# EAGLE board mapleSDuino-V0.9_006-eagle7 (EAGLE 7.6.0)
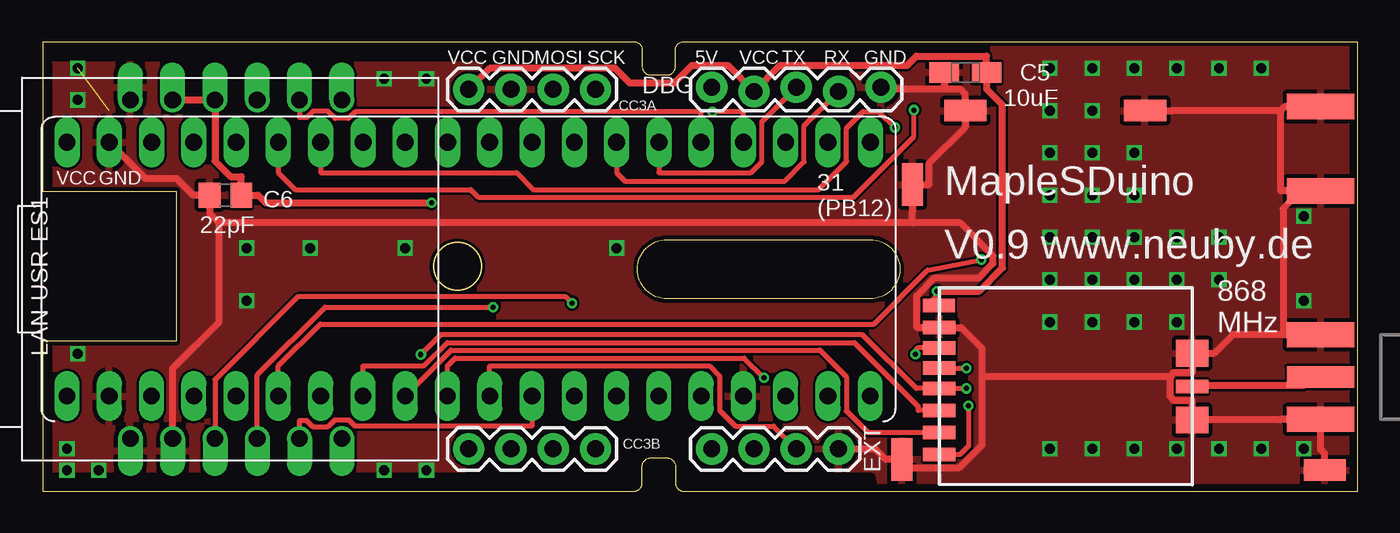
[diagram p0: board, top side]
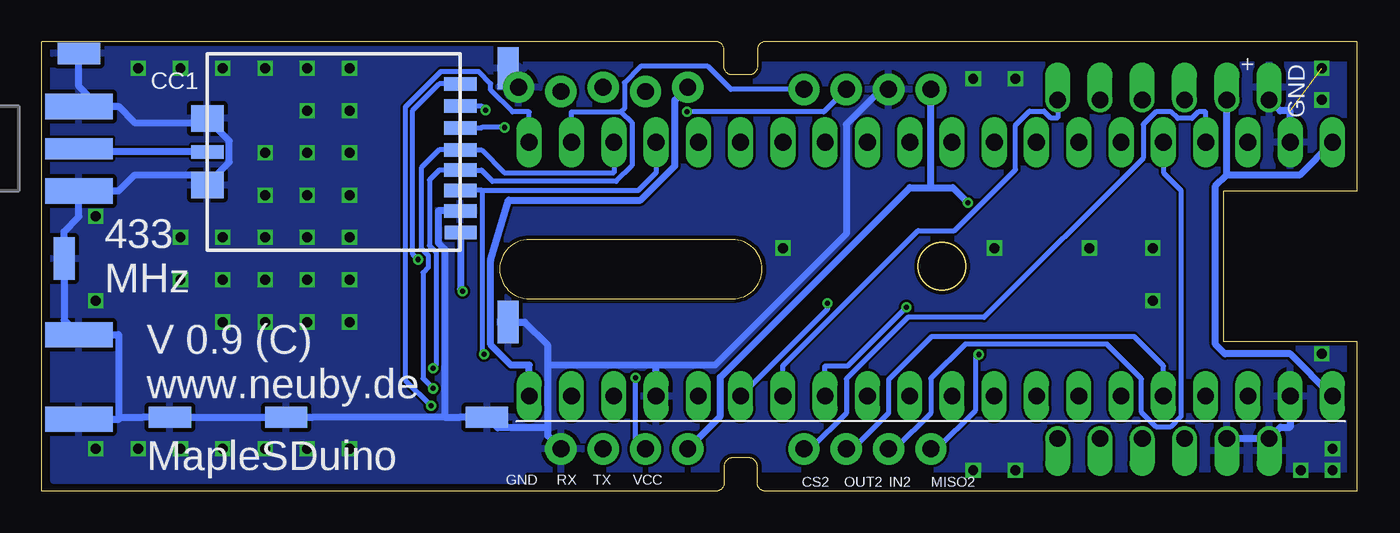
[diagram p1: board, bottom side, seen from below]

Size 79 x 27 mm. Coordinates in mm from the lower left corner, seen from the top.
Outline: 0,0 35.5,0 arc90 36,0.5 36,1.5 arc-90 36.5,2 37.5,2 arc-90 38,1.5 38,0.5 arc90 38.5,0 79,0 79,27 38.5,27 arc90 38,26.5 38,25.5 arc-90 37.5,25 36.5,25 arc-90 36,25.5 36,26.5 arc90 35.5,27 0,27 0,18 8,18 8,9 0,9 0,0
Outline: 37.5,15.11 49.7,15.11 arc-180 49.7,11.56 37.5,11.56 arc-180 37.5,15.11
Outline: circle at 24.9,13.51 radius 1.41
Copper layers (1*16): Top 0.035mm / dielectric 1.5mm / Bottom 0.035mm
Design rules "Fusion_eagle_rule_v1.1": minimum track width 6mil, minimum drill 12mil, track to track 6mil, track to pad 6mil, pad to pad 6mil, via to via 6mil, smd to smd 0mil, copper to edge 10mil, drill to drill 10mil, minimum pad ring 10mil, minimum via ring 6mil, stop-mask expansion 2mil, vias tented up to drill 100mil, thermal gap 10mil
Net classes: 0 default: width 0.305 mm; 1 PWR: width 0.406 mm
tRestrict: 8 lines
bRestrict: 8 lines

## Footprints (pad centres in the part's own frame; a part is rotated, then mirrored left to right if it is on the bottom)
R/2012-12W = smd 1.75 x 1.26: + 1.275,0; - -1.275,0
C0805 = smd 1.3 x 1.5: 1 -0.95,0; 2 0.95,0
CC1101_MODULE1_SMD = smd 1.93 x 0.813: ANT 14.889,4.381; CSN -0.305,0.305; GDO0 -0.305,1.626; GDO2 -0.305,2.946; GND@0 -0.305,7.925; MISO -0.305,4.267; MOSI -0.305,6.706; SCLK -0.305,5.486; VCC -0.318,9.238 | smd 1.93 x 1.6: GND@1 14.889,6.381; GND@2 14.889,2.381
1X04 = drill 1.016 pad 1.88: 1 0,0; 2 2.54,0; 3 5.08,0; 4 7.62,0
1X05_LOCK = drill 1.016 pad 1.88: 1 0,0.127; 2 2.54,-0.127; 3 5.08,0.127; 4 7.62,-0.127; 5 10.16,0.127
USR-ES1 = drill 1 pad 1.35 offset: 1 -10.16,5.715; 2 -10.16,3.175; 3 -10.16,0.635; 4 -10.16,-1.905; 5 -10.16,-4.445; 6 -10.16,-6.985; 7 10.16,-6.985; 8 10.16,-4.445; 9 10.16,-1.905; 10 10.16,0.635; 11 10.16,3.175; 12 10.16,5.715
SMD1,27-2,54 = smd 1.27 x 2.54: 1 0,0
20-DIP = drill 1.016 pad 1.27 long: 1 -24.13,-7.62; 2 -21.59,-7.62; 3 -19.05,-7.62; 4 -16.51,-7.62; 5 -13.97,-7.62; 6 -11.43,-7.62; 7 -8.89,-7.62; 8 -6.35,-7.62; 9 -3.81,-7.62; 10 -1.27,-7.62; 11 1.27,-7.62; 12 3.81,-7.62; 13 6.35,-7.62; 14 8.89,-7.62; 15 11.43,-7.62; 16 13.97,-7.62; 17 16.51,-7.62; 18 19.05,-7.62; 19 21.59,-7.62; 20 24.13,-7.62 | drill 1 pad 1.27 long: 21 24.13,7.62; 22 21.59,7.62; 23 19.05,7.62; 24 16.51,7.62; 25 13.97,7.62; 26 11.43,7.62; 27 8.89,7.62; 28 6.35,7.62; 29 3.81,7.62; 30 1.27,7.62; 31 -1.27,7.62; 32 -3.81,7.62; 33 -6.35,7.62; 34 -8.89,7.62; 35 -11.43,7.62; 36 -13.97,7.62; 37 -16.51,7.62; 38 -19.05,7.62; 39 -21.59,7.62; 40 -24.13,7.62
SMA_EDGELAUNCH = smd 4.064 x 1.524: GND@1 2.032,-2.54; GND@2 2.032,2.54 | smd 4.064 x 1.524 bottom: GND@3 2.032,2.54; GND@4 2.032,-2.54 | smd 4.064 x 1.27: P 2.032,0

## Placement (x,y rotation side)
C5  10uF  [R/2012-12W]  55.42,25.15 0 top
C6  22pF  [C0805]  10.97,17.78 180 top
CC0  CC1101  [CC1101_MODULE1_SMD]  54.15,1.91 0 top
CC1  CC1101_MODULE1SMALL  [CC1101_MODULE1_SMD]  54.15,24.77 180 bottom
CC3A  [1X04]  25.57,24.13 0 top
CC3B  [1X04]  25.57,2.54 0 top
DBG  [1X05_LOCK]  40.18,24.13 0 top
EXT  [1X04]  40.18,2.54 0 top
IC2  LAN-USR-ES1  [USR-ES1]  10.97,13.34 90 top
PAD1  WIREPADSMD1,27-254  [SMD1,27-2,54]  52.24,18.41 0 top
PAD2  WIREPADSMD1,27-254  [SMD1,27-2,54]  77.01,1.27 90 top
PAD3  WIREPADSMD1,27-254  [SMD1,27-2,54]  55.42,22.86 90 top
PAD4  WIREPADSMD1,27-254  [SMD1,27-2,54]  71.3,4.45 270 bottom
PAD5  WIREPADSMD1,27-254  [SMD1,27-2,54]  66.22,22.86 90 top
PAD6  WIREPADSMD1,27-254  [SMD1,27-2,54]  51.61,1.91 0 top
PAD7  WIREPADSMD1,27-254  [SMD1,27-2,54]  64.31,4.45 270 bottom
PAD8  WIREPADSMD1,27-254  [SMD1,27-2,54]  50.98,10.16 0 bottom
PAD9  WIREPADSMD1,27-254  [SMD1,27-2,54]  76.76,26.29 270 bottom
PAD10  WIREPADSMD1,27-254  [SMD1,27-2,54]  77.64,13.97 0 bottom
PAD11  WIREPADSMD1,27-254  [SMD1,27-2,54]  52.24,4.45 270 bottom
PAD12  WIREPADSMD1,27-254  [SMD1,27-2,54]  50.98,25.4 180 bottom
U$1  MAPLEMINI  [20-DIP]  25.57,13.34 180 bottom
X1  [SMA_EDGELAUNCH]  78.79,6.86 180 top
X2  [SMA_EDGELAUNCH]  78.79,20.57 0 bottom

## Library data of the parts
C5 C6 = rcl
CC0 CC1 = Martin-Communication-V4
CC3A CC3B EXT = SparkFun-Connectors; PROD_ID: CONN-09696
DBG = SparkFun-Connectors
IC2 = Martin-Communication
PAD1-PAD12 = wirepad
U$1 = maplemini-small
X1 X2 = adafruit

## Nets
+5V [PWR]: DBG.1 U$1.21
ANT1 [PWR]: CC1.ANT X2.P
ANT2: CC0.ANT X1.P
CC_CS0: CC0.CSN U$1.20
CC_CS1: CC1.CSN U$1.35
CC_CS2: CC3B.4 U$1.4
CC_CS3: U$1.25
CC_IN_0: CC0.GDO2 U$1.33
CC_IN_1: CC1.GDO2 U$1.7
CC_IN_2: CC3B.2 U$1.5
CC_IN_3: U$1.37
CC_OUT_0: CC0.GDO0 U$1.32
CC_OUT_1: CC1.GDO0 U$1.6
CC_OUT_2: CC3B.3 U$1.36
GND [PWR]: C5.- C6.2 CC0.GND@0 CC0.GND@1 CC0.GND@2 CC1.GND@0 CC1.GND@1 CC1.GND@2 CC3A.2 DBG.5 EXT.4 IC2.1 IC2.2 IC2.12 PAD1.1 PAD2.1 PAD3.1 PAD4.1 PAD5.1 PAD6.1 PAD7.1 PAD8.1 PAD9.1 PAD10.1 PAD11.1 PAD12.1 U$1.2 U$1.24 U$1.39 X1.GND@1 X1.GND@2 X1.GND@3 X1.GND@4 X2.GND@1 X2.GND@2 X2.GND@3 X2.GND@4
MISO1: IC2.7 U$1.27
MISO2: CC0.MISO CC1.MISO CC3B.1 U$1.18
MOSI1: IC2.3 U$1.26
MOSI2: CC0.MOSI CC1.MOSI CC3A.3 U$1.17
NRESET: U$1.34
RX1: DBG.4 U$1.14
RX2: EXT.3 U$1.30
RX3: U$1.22
SCK1: IC2.4 U$1.28
SCK2: CC0.SCLK CC1.SCLK CC3A.4 U$1.19
SS1: IC2.5 U$1.29
SWCLK/TCK: U$1.10
SWDIO/TMS: U$1.11
SWO/TDO: U$1.8
TDI: U$1.9
TX1: DBG.3 U$1.15
TX2: EXT.2 U$1.31
TX3: U$1.23
VCC [PWR]: C5.+ C6.1 CC0.VCC CC1.VCC CC3A.1 DBG.2 EXT.1 IC2.10 IC2.11 U$1.1 U$1.40
WIZ_RST: IC2.8 U$1.16

## Tracks (layer width: path | path; a pad name or v marks a point on that pad's centre or on a via)
+5V
  Bottom 0.406: U$1.21 49.7,7.58 50.8,7.58 52.02,8.8 52.02,13.86 50.94,17.48 43.01,17.48 40.95,19.54 40.95,23.48 DBG.1
ANT1
  Bottom 0.406: CC1.ANT 76.76,20.38 X2.P
ANT2
  Top 0.406: CC0.ANT arc-90 69.1,6.35 70.66,6.35 75.74,6.35 arc-90 76.25,6.86 X1.P
CC_CS0  (via drill 0.3 pad 0.61)
  Top 0.305: v55.6,5.12 55.6,2.7 55.12,2.21 CC0.CSN
  Bottom 0.305: v55.6,5.12 57.16,6.68 57.16,23.07 55.03,25.2 52.73,25.2 52.02,24.48 52.02,24.09 50.71,22.78 49.7,22.78 U$1.20
CC_CS1  (via drill 0.3 pad 0.61)
  Top 0.305: v56.38,13.91 53.15,13.28 49.91,10.04 16.66,10.04 14.14,7.53 U$1.35
  Bottom 0.305: CC1.CSN 55.12,24.46 56.7,22.88 56.7,14.23 v56.38,13.91
CC_CS2
  Bottom 0.305: U$1.4 9.06,22.78 9.51,22.78 9.9,22.39 10.75,22.39 11.14,22.79 12.06,22.79 12.82,22.04 12.82,20 22.38,10.44 26.96,10.44 30.66,6.75 30.66,4.69 32.8,2.54 CC3B.4
CC_IN_0
  Top 0.305: CC0.GDO2 52.58,4.85 52.58,5.12 48.76,8.93 24.28,8.93 22.88,7.53 19.23,7.53 U$1.33
CC_IN_1  (via drill 0.3 pad 0.61)
  Top 0.305: U$1.7 16.68,19.13 28.45,19.13 29.46,18.11 46.6,18.11 48.28,19.8 48.28,21.8 49.28,22.8 50.23,22.8 v51.18,21.84
  Bottom 0.305: CC1.GDO2 52.58,21.82 52.55,21.84 v51.18,21.84
CC_IN_2
  Bottom 0.305: CC3B.2 27.72,2.54 25.57,4.69 25.57,6.77 23.51,8.83 15,8.83 12.92,6.75 12.92,4.74 12.02,3.85 11.19,3.85 10.54,4.49 10.54,18.07 11.61,19.13 U$1.5
CC_OUT_0
  Top 0.305: U$1.32 24.52,8.47 46.67,8.47 48.27,6.87 48.27,4.82 49.56,3.53 CC0.GDO0
CC_OUT_1  (via drill 0.3 pad 0.61)
  Top 0.305: v52.33,22.89 52.33,21.29 48.7,17.66 26.15,17.66 25.69,18.11 15.16,18.11 14.14,19.13 U$1.6
  Bottom 0.305: v52.33,22.89 52.58,23.14 CC1.GDO0
CC_OUT_2
  Bottom 0.305: U$1.36 11.61,7.53 13.36,9.29 25.54,9.29 28.11,6.71 28.11,4.69 30.26,2.54 CC3B.3
GND  (via drill 0.6)  (1 unrouted)
  Top 0.406: 56.43,6.89 67.72,6.89 | 56.43,6.89 56.43,2.78 55.06,1.41 52.11,1.41 PAD6.1 50.62,1.91 49.98,2.54 EXT.4 | 56.43,6.89 56.43,8.57 55.17,9.83 CC0.GND@0 52.52,9.83 52.5,9.85 52.5,11.74 53.57,12.81 56.22,12.81 57.09,13.68 57.09,14.14 55.11,16.11 52.24,16.11 | 54.15,24.16 | 54.15,24.16 55.11,24.16 55.42,23.85 PAD3.1 55.42,21.87 53.24,19.68 53.24,18.41 PAD1.1 52.24,17.6 52.24,16.79 52.24,16.11 | DBG.5 50.44,24.16 54.15,24.16 | 52.24,16.11 10.58,16.11 | 67.72,6.89 67.96,7.13 69.04,7.13 CC0.GND@1 70.36,8.29 71.47,9.4 74.51,9.4 | 67.72,6.89 67.72,5.68 67.96,5.44 69.04,5.44 CC0.GND@2 74.34,4.29 74.37,4.32 X1.GND@2 76.76,2.52 77.01,2.26 PAD2.1 | 74.37,22.86 74.62,23.11 75.56,23.11 X2.GND@2 | 74.37,22.86 74.37,18.03 75.56,18.03 | 74.37,22.86 67.84,22.86 PAD5.1 | 75.56,18.03 74.51,16.98 74.51,9.4 | X1.GND@1 74.51,9.4 | X2.GND@1 75.56,18.03 | C5.- 54.15,24.16 | 10.58,16.11 10.02,16.67 C6.2 9.01,17.78 8.01,18.78 6.16,18.78 U$1.2 | IC2.2 7.79,7.37 10.58,10.16 10.58,16.11
  Bottom 0.406: 48.59,7.58 48.59,8.76 49.98,10.16 PAD8.1 | 48.59,3.8 48.59,7.58 | 42.09,7.58 48.59,7.58 | CC3A.2 28.56,24.13 30.66,22.03 30.66,15.46 38.54,7.58 42.09,7.58 | 42.09,7.58 | 48.59,3.8 51.6,3.8 PAD11.1 53.87,4.45 54.78,4.45 | EXT.4 48.59,3.33 48.59,3.8 | 54.78,4.45 62.68,4.45 PAD7.1 PAD4.1 72.92,4.45 74.37,4.45 | 54.78,4.45 54.78,14.54 55.17,14.93 55.17,16.84 CC1.GND@0 | U$1.24 42.09,7.58 | DBG.5 50.98,24.89 PAD12.1 | IC2.2 IC2.1 4.58,3.85 3.99,3.85 U$1.39 | 75.56,23.11 76.76,24.31 PAD9.1 | 75.56,23.11 74.37,23.11 73.36,22.11 69.04,22.11 | X2.GND@2 75.56,23.11 | 69.04,22.11 69.04,21.84 68.51,21.84 67.72,21.04 67.72,19.76 68.67,18.82 69.04,18.82 | CC1.GND@2 69.04,22.11 | 69.04,18.82 69.04,18.96 73.44,18.96 74.37,18.03 X2.GND@1 76.76,16.48 77.64,15.6 PAD10.1 77.64,10.29 X1.GND@1 74.37,9.4 74.37,4.45 | CC1.GND@1 69.04,18.82 | U$1.2 3.99,22.84 4.59,22.84 IC2.12 | 74.37,4.45 74.37,4.32 X1.GND@2
  other vias: 2.08,25.4 2.08,23.5 2.08,8.26 1.45,1.27 1.45,2.54 3.35,1.27 20.5,1.27 23.04,1.27 12.24,11.43 12.24,14.61 16.05,14.61 20.5,24.77 34.47,14.61 60.5,25.4 63.04,25.4 65.58,25.4 68.12,25.4 70.66,25.4 73.2,25.4 75.74,11.43 75.74,16.51 60.5,22.86 60.5,20.32 60.5,17.78 60.5,15.24 60.5,12.7 60.5,10.16 60.5,2.54 63.04,2.54 65.58,2.54 68.12,2.54 70.66,2.54 73.2,2.54 75.74,2.54 70.66,15.24 70.66,12.7 65.58,15.24 65.58,12.7 65.58,10.16 65.58,17.78 65.58,20.32 63.04,20.32 63.04,22.86 63.04,17.78 63.04,15.24 63.04,12.7 63.04,10.16 68.12,15.24 68.12,12.7 68.12,10.16 23.04,24.77 21.77,14.61
  pour Bottom: 78.28,26.67 0.81,26.67 0.81,0.64 78.28,0.64
  pour Top: 0.81,0.64 0.81,26.67 78.28,26.67 78.28,0.64
MISO1
  Bottom 0.305: IC2.7 17.95,22.44 18.39,22.44 18.78,22.82 19.66,22.82 20.5,21.98 20.5,19.31 24.16,15.64 26.35,15.64 34.47,7.53 U$1.27
MISO2  (via drill 0.3 pad 0.61)
  Top 0.305: v22.7,8.21 23.88,9.39 49.25,9.39 52.46,6.17 CC0.MISO 55.12,6.17 v55.48,6.17
  Bottom 0.305: CC3B.1 25.21,2.54 22.88,4.87 22.88,8.03 v22.7,8.21 | v55.48,6.17 56.09,6.78 56.09,13.12 55.77,13.44 55.77,14.17 56.19,14.59 56.19,19.42 55.12,20.5 CC1.MISO 53.33,20.5 52.58,20.5 51.2,19.13 44.62,19.13 U$1.18
MOSI1  (via drill 0.3 pad 0.61)
  Top 0.305: v31.79,11.3 31.41,11.67 15.3,11.67 10.34,6.7 IC2.3
  Bottom 0.305: U$1.26 31.79,10.93 v31.79,11.3
MOSI2  (via drill 0.3 pad 0.61)
  Top 0.305: v52.42,8.22 52.42,8.46 52.58,8.61 CC0.MOSI | v40.22,22.78 42.09,22.78 U$1.17
  Bottom 0.305: 52.53,18.06 52.53,8.33 v52.42,8.22 | CC3A.3 32,22.78 v40.22,22.78 | U$1.17 42.09,19.13 43.15,18.06 52.53,18.06 | 52.53,18.06 CC1.MOSI
RX1
  Top 0.305: DBG.4 45.73,21.94 45.73,19.78 44.58,18.62 34.97,18.62 34.47,19.13 U$1.14
RX2
  Top 0.305: U$1.30 26.84,7.53 40.04,7.53 40.65,6.91 40.65,4.85 41.6,3.9 43.9,3.9 EXT.3
SCK1  (via drill 0.3 pad 0.61)
  Top 0.305: IC2.4 12.88,6.98 16.95,11.05 v27.04,11.05
  Bottom 0.305: v27.04,11.05 30.57,7.53 31.92,7.53 U$1.28
SCK2  (via drill 0.3 pad 0.61)
  Top 0.305: v55.47,7.39 55.12,7.39 CC0.SCLK
  Bottom 0.305: v55.47,7.39 55.31,7.55 55.31,14.36 55.7,14.74 55.7,18.7 55.12,19.28 CC1.SCLK 53.33,19.28 52.58,19.28 51.91,18.61 44.48,18.61 43.54,19.56 43.54,22.14 44.17,22.78 | 44.17,22.78 47.16,22.78 U$1.19 | CC3A.4 37.6,24.13 38.98,25.51 43.02,25.51 43.99,24.54 43.99,22.97 44.17,22.78
SS1
  Top 0.305: IC2.5 15.41,4.23 15.85,4.23 16.24,3.85 17.1,3.85 17.51,4.26 18.4,4.26 18.76,3.9 29.38,3.9 U$1.29
TX1
  Top 0.305: U$1.15 37.01,19.13 42.54,19.13 43.19,19.78 43.19,22.19 DBG.3
TX2  (via drill 0.3 pad 0.61)
  Top 0.305: v43.31,6.81 42.13,7.99 24.76,7.99 24.3,7.53 U$1.31
  Bottom 0.305: EXT.2 43.31,3.13 v43.31,6.81
VCC  (via drill 0.3 pad 0.61)
  Top 0.406: CC3A.1 26.88,25.43 34.34,25.43 35.24,24.53 37.95,24.53 38.99,25.58 41.15,25.58 DBG.2 44.29,25.58 51.92,25.58 52.48,26.13 56.7,26.13 C5.+ 56.7,24.16 57.66,23.2 57.66,13.42 56.25,12.01 v53.71,12.01 53.71,11.68 53.17,11.14 CC0.VCC | IC2.11 IC2.10 10.34,19.83 11.28,18.89 11.92,18.89 C6.1 12.93,17.78 13.39,17.32 v23.34,17.32
  Bottom 0.406: 25.57,18.23 24.25,18.23 v23.34,17.32 | EXT.1 38.22,4.5 38.22,6.86 26.84,18.23 25.57,18.23 | 25.57,18.23 CC3A.1 | CC1.VCC 53.83,12.14 v53.71,12.01 | 7.79,19.02 IC2.11 | U$1.40 3.97,8.24 7.9,8.24 8.48,8.82 8.48,18.33 7.79,19.02 | 7.79,19.02 3.38,19.02 U$1.1
WIZ_RST
  Top 0.305: IC2.8 15.41,22.44 15.85,22.44 16.24,22.82 17.11,22.82 17.55,22.39 18.36,22.39 18.76,22.78 39.55,22.78 U$1.16

## Text on the board
tNames: VCC | GND | MOSI | SCK | 5V | VCC | TX | RX | GND | C5 | 10uF | 31 / (PB12) | VCC | GND | C6 | MapleSDuino | 22pF | V0.9 www.neuby.de | 868 / MHz | LAN-USR-ES1
bNames: GND | + | CC1 | 433 / MHz | V 0.9 (C) / www.neuby.de | MapleSDuino | MISO2 | IN2 | OUT2 | CS2 | VCC | TX | RX | GND